# Altium PCB V6-IRarray.pcbdoc
Units mm, origin at the board's own origin, x right, y up, seen from the top; angles counter-clockwise.
Board outline 81.01 x 98.47 mm, 2 copper layers (Top Layer, Bottom Layer); 65 components, 52 nets, 132 pads, 0 vias.
Unrouted connection lines stored in the file: 28.
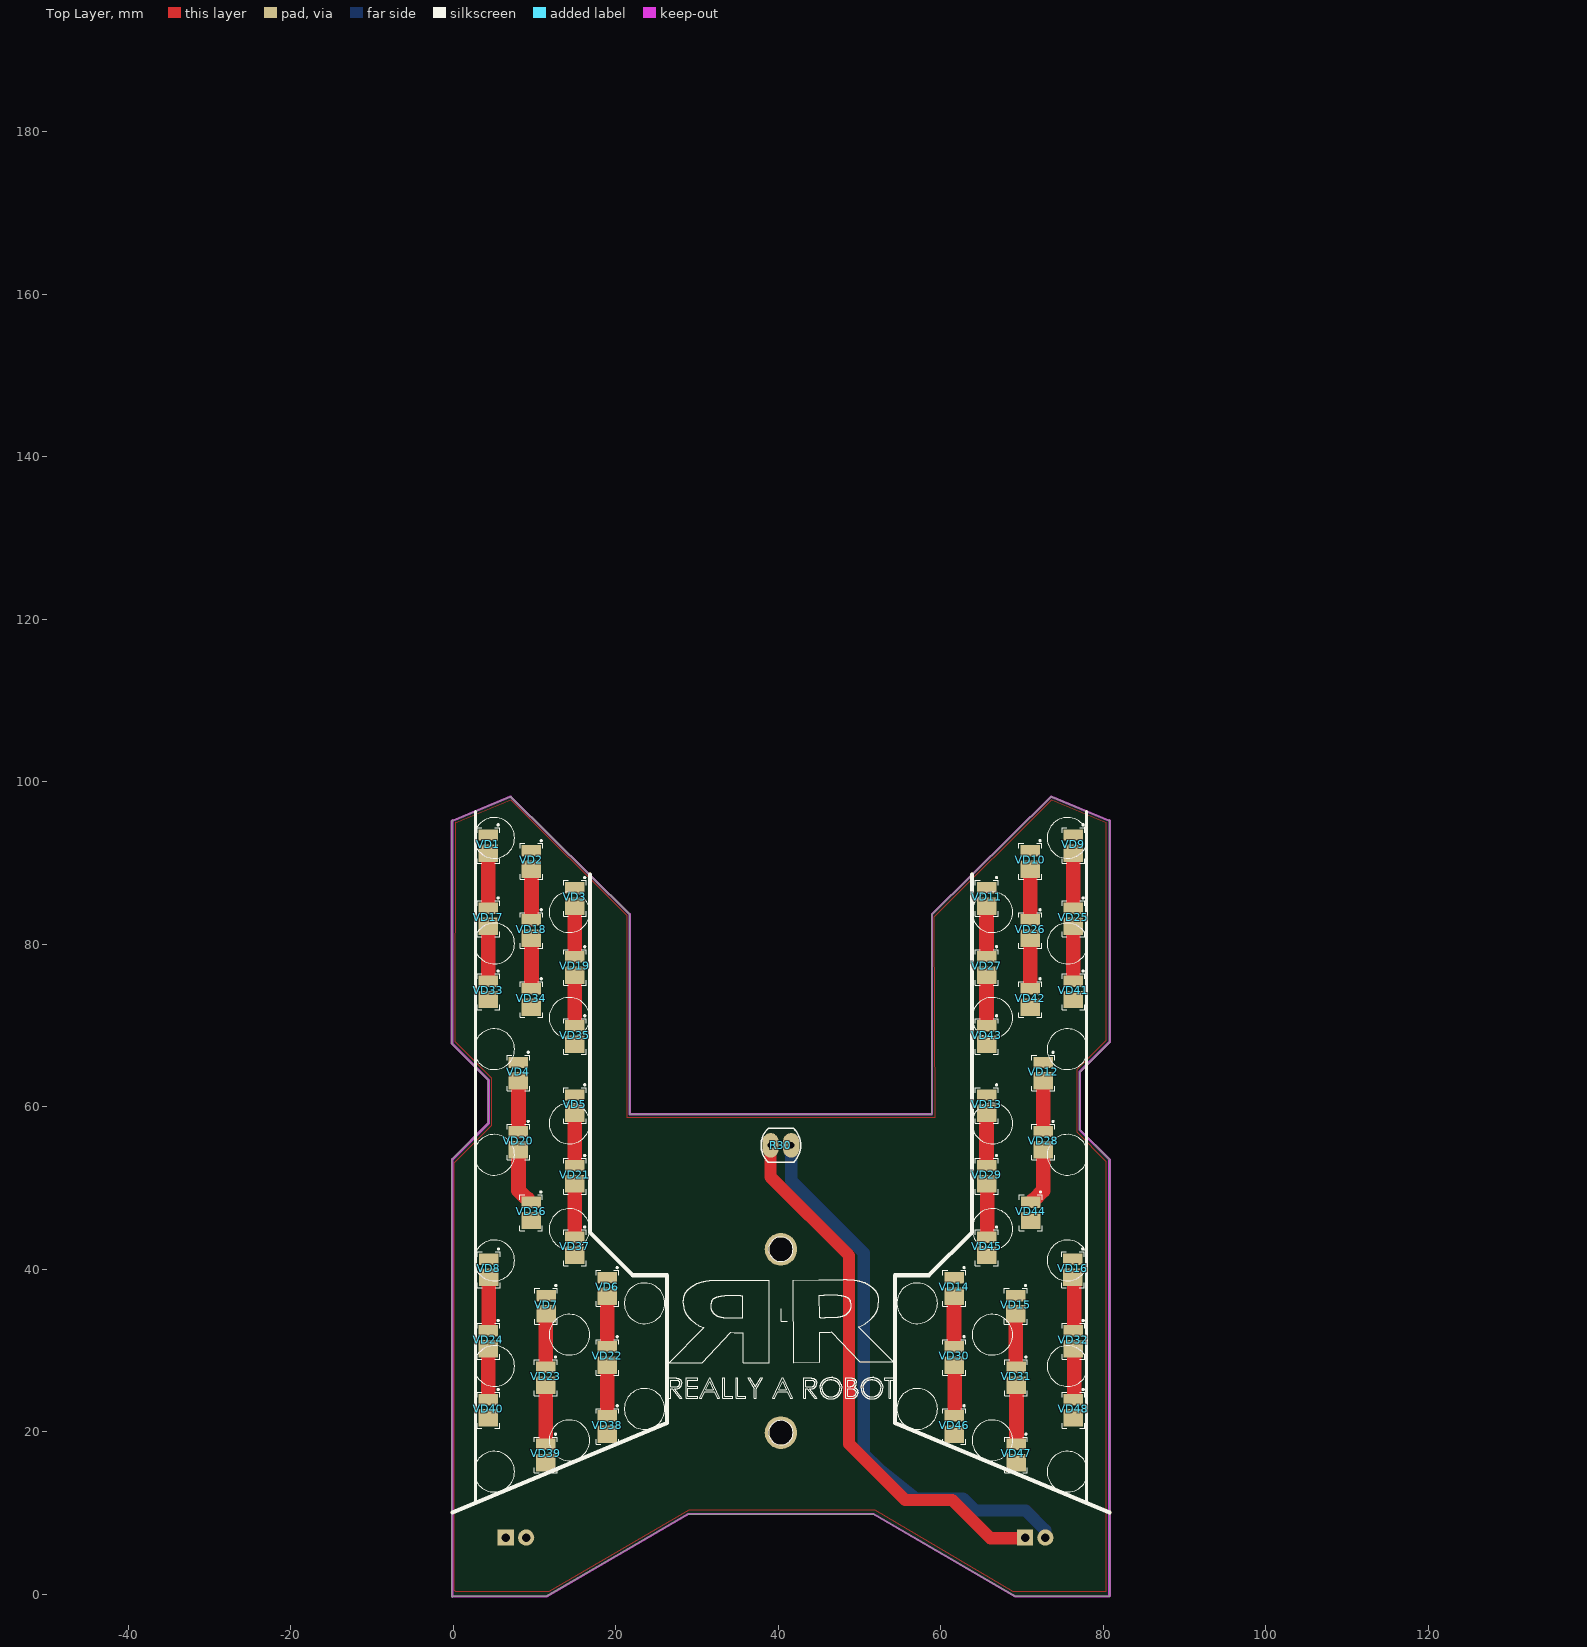
[diagram p0: Top Layer view]
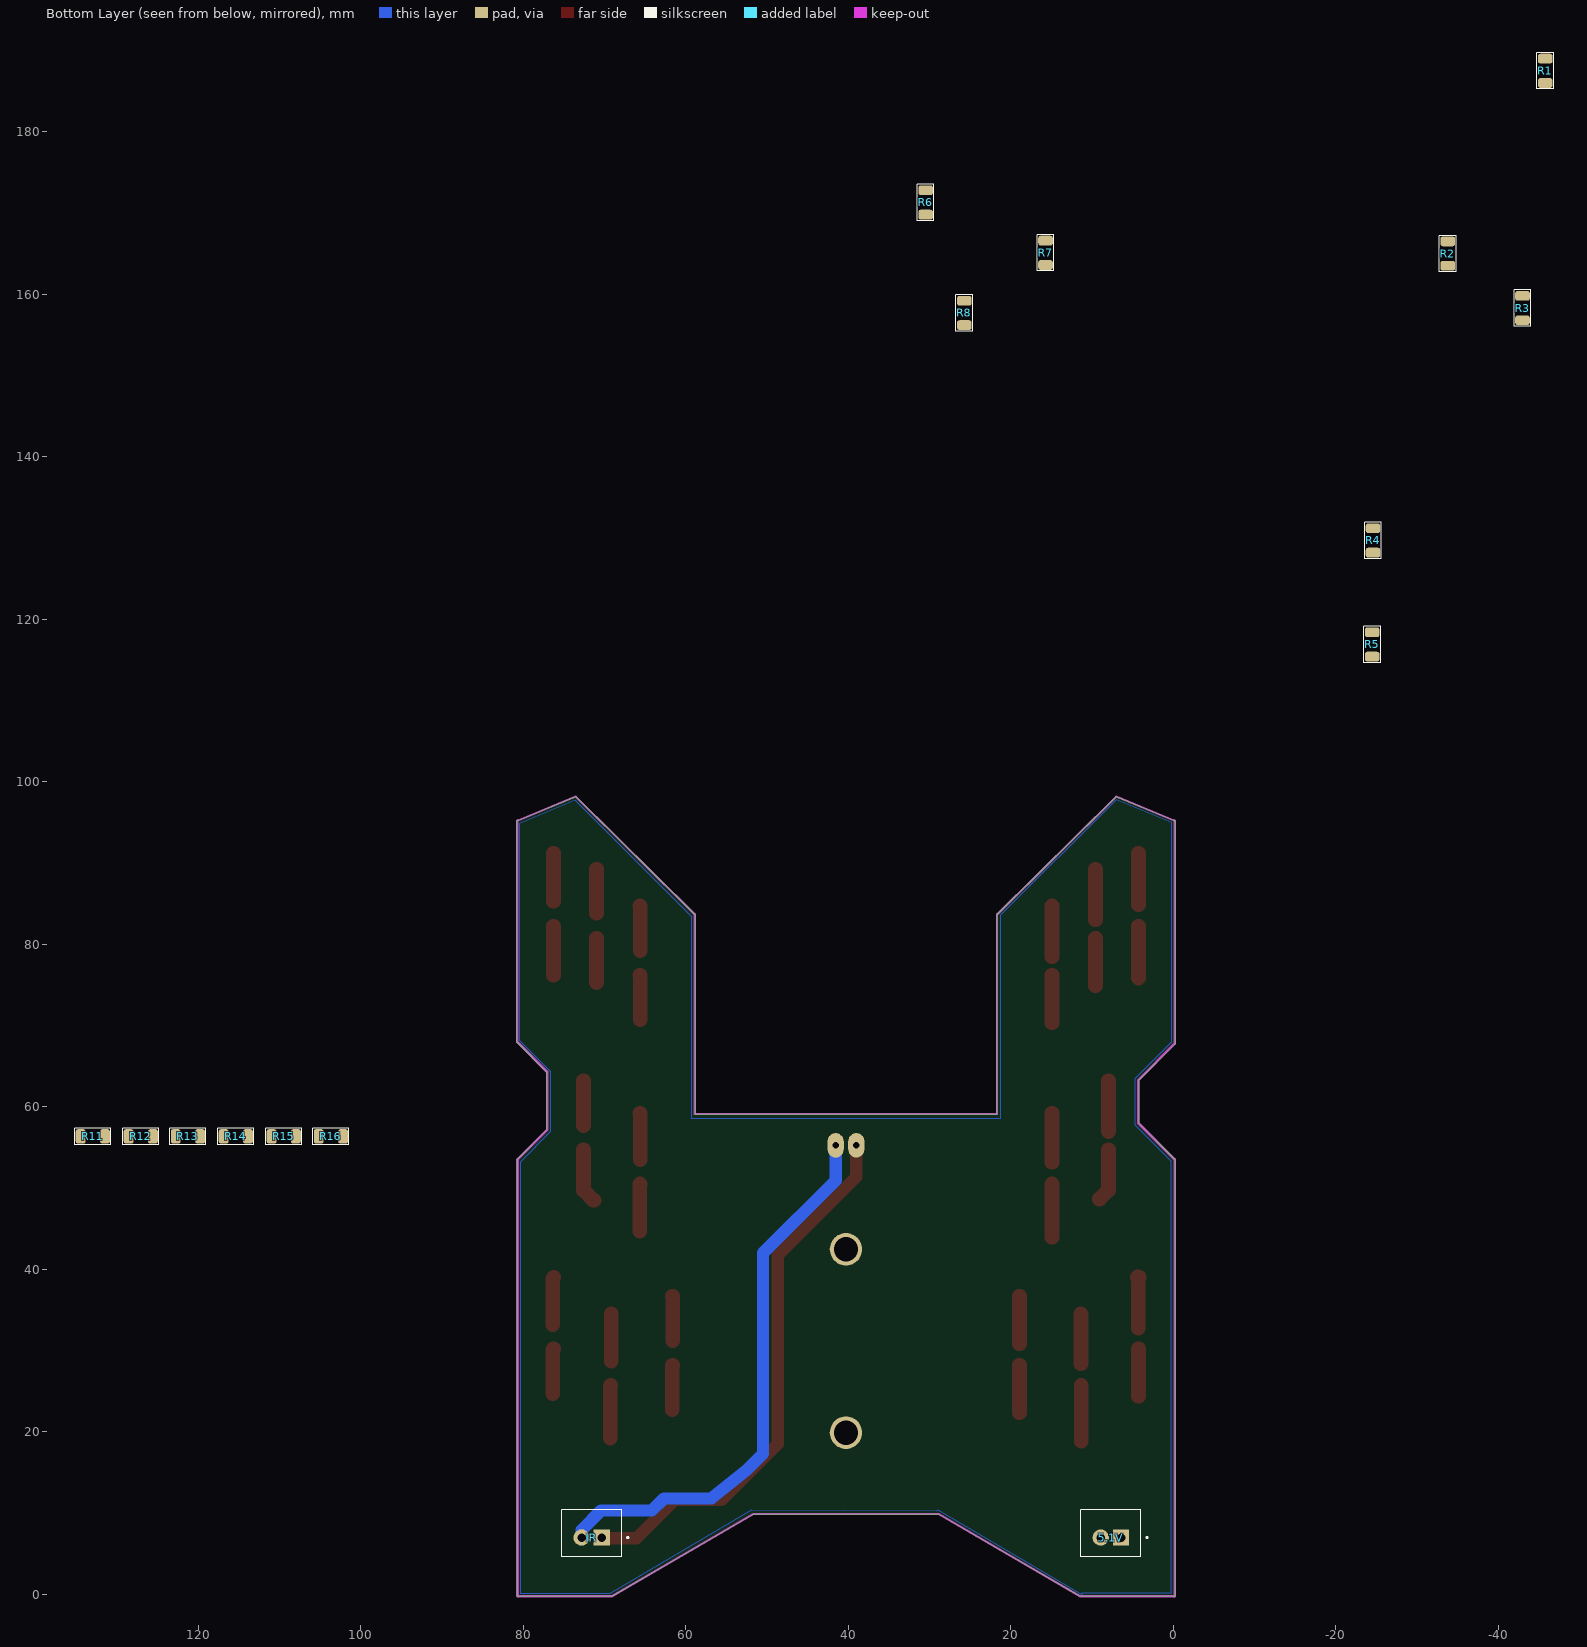
[diagram p1: Bottom Layer view, seen from below]

## Layer stack, top to bottom
Top Solder: solder mask 0.0102, Solder Resist, Dk 3.5
Top Layer: signal copper 0.0356
Dielectric1: dielectric 0.32, FR-4, Dk 4.8
Bottom Layer: signal copper 0.0356
Bottom Solder: solder mask 0.0102, Solder Resist, Dk 3.5

## Board outline
-0.2,-0.2 ccw(c-0.1,-0.2) -0.023,-0.264 11.437,-0.271 11.473,-0.261 28.891,9.871 51.709,9.871 69.127,-0.261 69.163,-0.271 80.628,-0.271 ccw(c80.676,-0.182) 80.776,-0.182 80.776,53.476 80.747,53.547 77.1,57.193 77.1,64.258 80.771,67.929 80.8,68 80.8,95.141 ccw(c80.7,95.141) 80.657,95.232 73.616,98.172 73.538,98.157 58.904,83.692 58.883,83.642 58.883,59.087 21.717,59.087 21.717,83.642 21.696,83.692 7.062,98.157 6.984,98.172 -0.065,95.228 ccw(c-0.107,95.137) -0.207,95.137 -0.207,67.807 -0.178,67.736 4.3,63.258 4.3,58.017 -0.171,53.547 -0.2,53.476

## Design rules (kind name [scope] priority, off if disabled: settings)
Clearance [All] p1: gap=0.25 ignorepadtopadclearanceinfootprint=TRUE
ComponentClearance [All] p1: gap=0.25 collisioncheckmode=3 verticalgap=0.01 showdistances=FALSE
DiffPairsRouting [All] p1: maxlimit=2.54 minlimit=0.127 mostfreqgap=0.254 toplayer_minwidth=0.508 toplayer_maxwidth=2.54 toplayer_prefwidth=0.508 bottomlayer_minwidth=0.508 bottomlayer_maxwidth=2.54 bottomlayer_prefwidth=0.508 maxuncoupledlength=12.7
HoleSize [All] p1: absolutevalues=TRUE maxlimit=4 minlimit=0.3 maxpercent=80.000 minpercent=20.000
MinimumSolderMaskSliver [All] p1: minsoldermaskwidth=0.075
PlaneConnect [All] p1: planeconnectstyle=Relief reliefexpansion=0.254 reliefentries=4 reliefconductorwidth=1.524 reliefairgap=0.508
PolygonConnect [All] p1: connectstyle=Relief reliefconductorwidth=1.524 reliefentries=4 polygonreliefangle="90 Angle" airgapwidth=0.3
RoutingVias [All] p1: holewidth=0.711 width=1.27 viastyle="Through Hole" minholewidth=0.711 minwidth=1.27 maxholewidth=0.711 maxwidth=1.27
SilkToSilkClearance [All] p1: silktosilkclearance=0.1
SilkToSolderMaskClearance [IsPad] p1: minsilkscreentomaskgap=0.1 clearancetoexposedcopper=TRUE
SolderMaskExpansion [All] p1: expansion=0.1
Width Width_PWR [All] p1: maxlimit=5 minlimit=0.3 preferedwidth=0.5
23 further rules are at their usual default settings.

## Components (designator, comment, footprint, x,y, rotation, side; value= is the part's Value field where it differs from the comment)
5.1V "B2B-XH-A(LF)(SN)" JST_B2B-XH-A(LF)(SN) 7.7,7.5 r180 bottom
IR "B2B-XH-A(LF)(SN)" JST_B2B-XH-A(LF)(SN) 71.6,7.5 r180 bottom
R1 "21 5% 1/4W" R1206 -45.762,187.5 r90 bottom
R2 "21 5% 1/4W" R1206 -33.762,165 r90 bottom
R3 "21 5% 1/4W" R1206 -42.962,158.3 r270 bottom
R4 "21 5% 1/4W" R1206 -24.562,129.7 r90 bottom
R5 "21 5% 1/4W" R1206 -24.462,116.9 r90 bottom
R6 "21 5% 1/4W" R1206 30.5,171.3 r90 bottom
R7 "21 5% 1/4W" R1206 15.738,165.1 r90 bottom
R8 "21 5% 1/4W" R1206 25.738,157.7 r270 bottom
R11 "21 5% 1/4W" R1206 133,56.352 r180 bottom
R12 "21 5% 1/4W" R1206 127.1,56.352 r180 bottom
R13 "21 5% 1/4W" R1206 121.3,56.352 r180 bottom
R14 "21 5% 1/4W" R1206 115.4,56.352 r180 bottom
R15 "21 5% 1/4W" R1206 109.5,56.352 r180 bottom
R16 "21 5% 1/4W" R1206 103.7,56.352 r180 bottom
R30 "VT90N1" EXCE-VT90N1 40.3,55.252 r0 top
VD1 "LED3030??????????" LED_2835 4.35,92.5 r270 top
VD2 "LED3030??????????" LED_2835 9.65,90.55 r270 top
VD3 "LED3030??????????" LED_2835 15,86 r270 top
VD4 "LED3030??????????" LED_2835 8.05,64.5 r270 top
VD5 "LED3030??????????" LED_2835 15,60.5 r270 top
VD6 "LED3030??????????" LED_2835 19,38 r270 top
VD7 "LED3030??????????" LED_2835 11.45,35.8 r270 top
VD8 "LED3030??????????" LED_2835 4.4,40.3 r270 top
VD9 "LED3030??????????" LED_2835 76.35,92.5 r270 top
VD10 "LED3030??????????" LED_2835 71.05,90.55 r270 top
VD11 "LED3030??????????" LED_2835 65.7,86 r270 top
VD12 "LED3030??????????" LED_2835 72.65,64.5 r270 top
VD13 "LED3030??????????" LED_2835 65.7,60.5 r270 top
VD14 "LED3030??????????" LED_2835 61.7,38 r270 top
VD15 "LED3030??????????" LED_2835 69.25,35.8 r270 top
VD16 "LED3030??????????" LED_2835 76.3,40.3 r270 top
VD17 "LED3030??????????" LED_2835 4.35,83.5 r270 top
VD18 "LED3030??????????" LED_2835 9.65,82.05 r270 top
VD19 "LED3030??????????" LED_2835 15,77.5 r270 top
VD20 "LED3030??????????" LED_2835 8.05,56 r270 top
VD21 "LED3030??????????" LED_2835 15,51.8 r270 top
VD22 "LED3030??????????" LED_2835 19,29.5 r270 top
VD23 "LED3030??????????" LED_2835 11.4,27 r270 top
VD24 "LED3030??????????" LED_2835 4.35,31.5 r270 top
VD25 "LED3030??????????" LED_2835 76.35,83.5 r270 top
VD26 "LED3030??????????" LED_2835 71.05,82.05 r270 top
VD27 "LED3030??????????" LED_2835 65.7,77.5 r270 top
VD28 "LED3030??????????" LED_2835 72.65,56 r270 top
VD29 "LED3030??????????" LED_2835 65.7,51.8 r270 top
VD30 "LED3030??????????" LED_2835 61.7,29.5 r270 top
VD31 "LED3030??????????" LED_2835 69.3,27 r270 top
VD32 "LED3030??????????" LED_2835 76.35,31.5 r270 top
VD33 "LED3030??????????" LED_2835 4.35,74.5 r270 top
VD34 "LED3030??????????" LED_2835 9.65,73.55 r270 top
VD35 "LED3030??????????" LED_2835 15,69 r270 top
VD36 "LED3030??????????" LED_2835 9.6,47.3 r270 top
VD37 "LED3030??????????" LED_2835 15,43 r270 top
VD38 "LED3030??????????" LED_2835 19,21 r270 top
VD39 "LED3030??????????" LED_2835 11.4,17.5 r270 top
VD40 "LED3030??????????" LED_2835 4.35,23 r270 top
VD41 "LED3030??????????" LED_2835 76.35,74.5 r270 top
VD42 "LED3030??????????" LED_2835 71.05,73.55 r270 top
VD43 "LED3030??????????" LED_2835 65.7,69 r270 top
VD44 "LED3030??????????" LED_2835 71.1,47.3 r270 top
VD45 "LED3030??????????" LED_2835 65.7,43 r270 top
VD46 "LED3030??????????" LED_2835 61.7,21 r270 top
VD47 "LED3030??????????" LED_2835 69.3,17.5 r270 top
VD48 "LED3030??????????" LED_2835 76.35,23 r270 top

## Footprints (in the part's own frame and the unit in brackets; to place one, negate y for a bottom-side part, rotate by r counter-clockwise, add the part's x,y. Pads: shape width x height; smd on the part's side, far side on the other; paste and mask are expansions set on the pad)
EXCE-VT90N1 [mm] "THD, 2-Leads, Body Width 4.17mm (Max), Height 2.29mm"
  oval 2x3 hole 0.8: 1(-1.27,0) 2(1.27,0)
  silkscreen extent -2.44,-2.08 2.44,2.08, body extent -2.44,-2.09 2.44,2.09, height 2.29
JST_B2B-XH-A(LF)(SN) [mm]
  rect 2x2 hole 1.05: 1(1.25,-0.525)
  round 2 hole 1.05: 2(-1.25,-0.525)
  silkscreen extent -3.7,-2.88 4.54,2.88, body extent -3.7,-2.88 3.7,2.88, height 7
LED_2835 [mm]
  rect 1.4x2.4 smd paste-0.25: 1(-0.95,-0.05)
  rect 2.14x2.4 smd paste-0.25: 2(1.3,-0.05)
  silkscreen extent -2.3,-1.45 2.55,1.35, body extent -1.35,-1.75 2.05,1.65, height 2.2
R1206 [mm]
  rrect50% 1.2x1.8 smd: 1(-1.5,0) 2(1.5,0)
  silkscreen extent -2.22,-1.02 2.22,1.02, body extent -1.6,-0.8 1.6,0.8, height 0.6

## Part data
5.1V IR: "Connector Header Through Hole 2 position 0.098 (2.50mm)", Package=None, Check_prices=https://www.snapeda.com/parts/B2B-XH-A(LF)(SN)/JST+Sales+America+Inc./view-part/?ref=eda, MF="JST Sales America Inc.", MP=B2B-XH-A(LF)(SN), SnapEDA_Link=https://www.snapeda.com/parts/B2B-XH-A(LF)(SN)/JST+Sales+America+Inc./view-part/?ref=snap
R1 R2 R3 R4 R5 R6 R7 R8 R11 R12 R13 R14 R15 R16: library part R-1206, "SMD 1206 0.25W 5% 200V", Type=RES
R30: library part CMP-2000-07406-1, "Photoconductive Resistor, 200 kOhm, 100 V, 80 mW, -40 to 75 degC, 2-Pin THD, RoHS", Dark Resistance=200kohm, Manufacturer="Excelitas Technology", Operating Temperature Max=75癈, Operating Temperature Min=-40癈, Package Description="2-Pin Through Hole Device, Body Width 4.17 mm (Max), Height 2.29 mm", Power Rating=80mW, Resistance @ Lux=12kohm, Resistor Case Style=-, Voltage Rating=100V, Datasheet URL=http://datasheet.octopart.com/VT90N1-Excelitas-datasheet-10388451.pdf, Datasheet Version=09/2006, Manufacturer URL=http://www.excelitas.com/Pages/Index.aspx, Mounting Technology=ThroughHole, Package Reference=VT90N1, Packaging=Each, Product Range=-, SVHC=Cadmiumchloride(15-Jun-2015)
VD1 VD2 VD3 VD4 VD5 VD6 VD7 VD8 VD9 VD10 VD11 VD12 VD13 VD14 VD15 VD16 VD17 VD18 VD19 VD20 VD21 VD22 VD23 VD24 VD25 VD26 VD27 VD28 VD29 VD30 VD31 VD32 VD33 VD34 VD35 VD36 VD37 VD38 VD39 VD40 VD41 VD42 VD43 VD44 VD45 VD46 VD47 VD48: library part "LED 2835"

## Free pads (board coordinates)
  round 4 hole 3: 50(40.3,42.456) 51(40.3,19.889)

## Nets (pads, with @x,y where several pads share a name; then routed paths per layer and width w, separated by ;. In a path a pad name is that pad's centre, name@x,y a point inside that pad or via, vN(x,y) a via of type N, cw(c..) or ccw(c..) an arc to the next point about the centre after c; other vN are vias at no path point)
5V: 5.1V.2 R1.1 R2.1 R3.1 R4.1 R5.1 R6.1 R7.1 R8.1 R11.1 R12.1 R13.1 R14.1 R15.1 R16.1
A1-LDR: IR.1 R30.1 | length 67.3
  Top Layer w1.5: R30.1 39.03,51.37 48.7,41.7 48.7,18.5 55.6,11.6 61.4,11.6 66.1,6.9 IR.1@70.4,6.9
GND: 5.1V.1 VD33.2 VD34.2 VD35.2 VD36.2 VD37.2 VD38.2 VD39.2 VD40.2 VD41.2 VD42.2 VD43.2 VD44.2 VD45.2 VD46.2 VD47.2 VD48.2
NetIR_2: IR.2 R30.2 | length 68.7
  Bottom Layer w1.5: R30.2 41.57,50.93 50.5,42 50.5,17.3 52.421,15.38 52.483,15.33 56.855,11.8 62.7,11.8 64.2,10.3 70.439,10.3 72.85,7.889 IR.2 IR.2@72.85,6.9
NetR1_2: R1.2 VD1.1
NetR2_2: R2.2 VD2.1
NetR3_2: R3.2 VD3.1
NetR4_2: R4.2 VD4.1
NetR5_2: R5.2 VD5.1
NetR6_2: R6.2 VD6.1
NetR7_2: R7.2 VD7.1
NetR8_2: R8.2 VD8.1
NetR9_2: VD9.1
NetR10_2: VD10.1
NetR11_2: R11.2 VD11.1
NetR12_2: R12.2 VD12.1
NetR13_2: R13.2 VD13.1
NetR14_2: R14.2 VD14.1
NetR15_2: R15.2 VD15.1
NetR16_2: R16.2 VD16.1
NetVD1_2: VD1.2 VD17.1 | length 6.4
  Top Layer w1.8: VD17.1@4.3,84.85 VD1.2
NetVD2_2: VD2.2 VD18.1 | length 6.2
  Top Layer w1.8: VD18.1 VD2.2
NetVD3_2: VD3.2 VD19.1 | length 6.3
  Top Layer w1.8: VD19.1 VD3.2
NetVD4_2: VD4.2 VD20.1 | length 6.3
  Top Layer w1.8: VD20.1 VD4.2
NetVD5_2: VD5.2 VD21.1 | length 6.1
  Top Layer w1.8: VD21.1@14.95,53.15 VD5.2
NetVD6_2: VD6.2 VD22.1 | length 5.9
  Top Layer w1.8: VD22.1@18.95,30.85 VD6.2
NetVD7_2: VD7.2 VD23.1 | length 6.2
  Top Layer w1.8: VD23.1@11.35,28.35 11.375,28.375 11.375,34.475 VD7.2
NetVD8_2: VD8.2 VD24.1 | length 6.3
  Top Layer w1.8: VD24.1@4.325,32.75 VD8.2@4.325,38.975
  Top Layer w2: VD8.2@4.325,38.975 VD8.2
NetVD9_2: VD9.2 VD25.1 | length 5.9
  Top Layer w1.8: 76.3,85.3 VD9.2
NetVD10_2: VD10.2 VD26.1 | length 5.5
  Top Layer w1.8: 71,83.8 VD10.2
NetVD11_2: VD11.2 VD27.1 | length 5.5
  Top Layer w1.8: 65.6,79.2 65.6,84.65 VD11.2
NetVD12_2: VD12.2 VD28.1 | length 5.5
  Top Layer w1.8: 72.6,57.7 VD12.2
NetVD13_2: VD13.2 VD29.1 | length 5.7
  Top Layer w1.8: 65.6,53.5 65.6,59.15 VD13.2
NetVD14_2: VD14.2 VD30.1 | length 5.5
  Top Layer w1.8: 61.6,31.2 61.6,36.65 VD14.2
NetVD15_2: VD15.2 VD31.1 | length 5.8
  Top Layer w1.8: 69.2,28.7 VD15.2
NetVD16_2: VD16.2 VD32.1 | length 5.9
  Top Layer w1.8: VD16.2 76.4,38.85 76.4,33.2
NetVD17_2: VD17.2 VD33.1 | length 6.4
  Top Layer w1.8: VD33.1@4.3,75.85 VD17.2
NetVD18_2: VD18.2 VD34.1 | length 5.9
  Top Layer w1.8: VD34.1@9.6,74.9 VD18.2
NetVD19_2: VD19.2 VD35.1 | length 5.9
  Top Layer w1.8: VD35.1@14.95,70.35 VD19.2
NetVD20_2: VD20.2 VD36.1 | length 6.6
  Top Layer w1.8: VD20.2 8,49.7 9.05,48.65 VD36.1@9.15,48.65
NetVD21_2: VD21.2 VD37.1 | length 6.5
  Top Layer w1.8: VD37.1 VD21.2
NetVD22_2: VD22.2 VD38.1 | length 5.9
  Top Layer w1.8: VD38.1@18.95,22.35 VD22.2
NetVD23_2: VD23.2 VD39.1 | length 6.9
  Top Layer w1.8: VD39.1@11.35,18.85 VD23.2
NetVD24_2: VD24.2 VD40.1 | length 5.9
  Top Layer w1.8: VD40.1@4.3,24.35 VD24.2
NetVD25_2: VD25.2 VD41.1 | length 6
  Top Layer w1.8: 76.3,76.2 VD25.2
NetVD26_2: VD26.2 VD42.1 | length 5.5
  Top Layer w1.8: 71,75.3 VD26.2
NetVD27_2: VD27.2 VD43.1 | length 5.5
  Top Layer w1.8: 65.6,70.7 65.6,76.15 VD27.2
NetVD28_2: VD28.2 VD44.1 | length 6.8
  Top Layer w1.8: VD44.1@71.3,48.5 71.4,48.5 72.6,49.7 VD28.2
NetVD29_2: VD29.2 VD45.1 | length 5.8
  Top Layer w1.8: VD29.2 65.7,50.45 65.7,44.7
NetVD30_2: VD30.2 VD46.1 | length 5.5
  Top Layer w1.8: VD30.2 61.7,28.15 61.7,22.7
NetVD31_2: VD31.2 VD47.1 | length 6.5
  Top Layer w1.8: VD31.2 69.3,25.65 69.3,19.2
NetVD32_2: VD32.2 VD48.1 | length 5.5
  Top Layer w1.8: VD32.2 76.4,30.1 76.4,24.7

## Polygon pours and split planes (outlines as drawn)
GND on Top Layer "NONET_L-01_P-001" (solid, shelved, pour order 1): 0.1,0.5 0.1,53.1 4.7,57.7 4.7,63.5 0.2,68 0.286,94.777 0.286,95 0.225,94.939 7.062,97.8 21.3,83.562 21.3,58.7 59.27,58.7 59.206,83.39 73.616,97.8 80.3,95 80.3,68.148 76.7,64.548 76.7,56.9 80.3,53.3 80.3,0.314 68.877,0.314 51.932,10.35 28.972,10.35 11.738,0.314 0.286,0.314
5V on Bottom Layer "NONET_L-01_P-001" (solid, shelved, pour order 0): 0.2,0.2 0.3,0.3 0.3,53.3 4.7,57.7 4.7,63.5 0.2,68 0.2,94.8 0.2,94.963 7.062,97.8 21.3,83.562 21.3,83.2 21.3,58.5 59.3,58.5 59.3,83.4 73.616,97.716 80.5,94.8 80.5,94.7 80.5,68.2 76.7,64.4 76.7,56.9 80.4,53.2 80.4,0.1 69.3,0.1 51.917,10.4 29.1,10.3 29,10.4 11.2,-0.033 11.2,0.2

## Keep-outs
Keep-Out Layer:
  lines w0.127: -0.107,-0.2 11.437,-0.207 11.441,-0.206 28.873,9.935 51.727,9.935 69.159,-0.206 69.163,-0.207 80.7,-0.207 80.707,-0.2 ; -0.107,95.137 -0.102,95.143 7.009,98.113 7.017,98.112 21.652,83.647 21.654,83.642 21.654,59.023 58.946,59.023 58.946,83.642 58.948,83.647 73.583,98.112 ; 73.591,98.113 80.702,95.143 80.707,95.137
  lines w0.2: -0.107,95.137 -0.107,67.807 4.4,63.3 4.4,57.976 -0.1,53.476 -0.1,-0.2 ; 80.676,-0.182 80.676,53.476 77,57.151 77,64.3 80.7,68 80.7,95.141
  lines w0.254: 73.538,98.157 58.904,83.692 58.883,83.642 58.883,59.087 21.717,59.087 21.717,83.642 21.696,83.692 7.062,98.157 6.984,98.172 -0.065,95.228 ccw(c-0.107,95.137) -0.207,95.137 -0.207,67.807 -0.178,67.736 4.3,63.258 4.3,58.017 -0.171,53.547 -0.2,53.476 -0.2,-0.2 ccw(c-0.1,-0.2) -0.023,-0.264 11.437,-0.271 11.473,-0.261 28.891,9.871 51.709,9.871 69.127,-0.261 69.163,-0.271 80.628,-0.271 ccw(c80.676,-0.182) 80.776,-0.182 80.776,53.476 80.747,53.547 77.1,57.193 77.1,64.258 80.771,67.929 80.8,68 80.8,95.141 ccw(c80.7,95.141) 80.657,95.232 73.616,98.172

## Silkscreen, mask and mechanical layers (free items; w line width, h text height)
Top Overlay:
  drawing of 18889 lines, arcs and shapes, not listed